# EAGLE board Magician_encoder Panel v10 (EAGLE 6.5.0), part 1 of 2
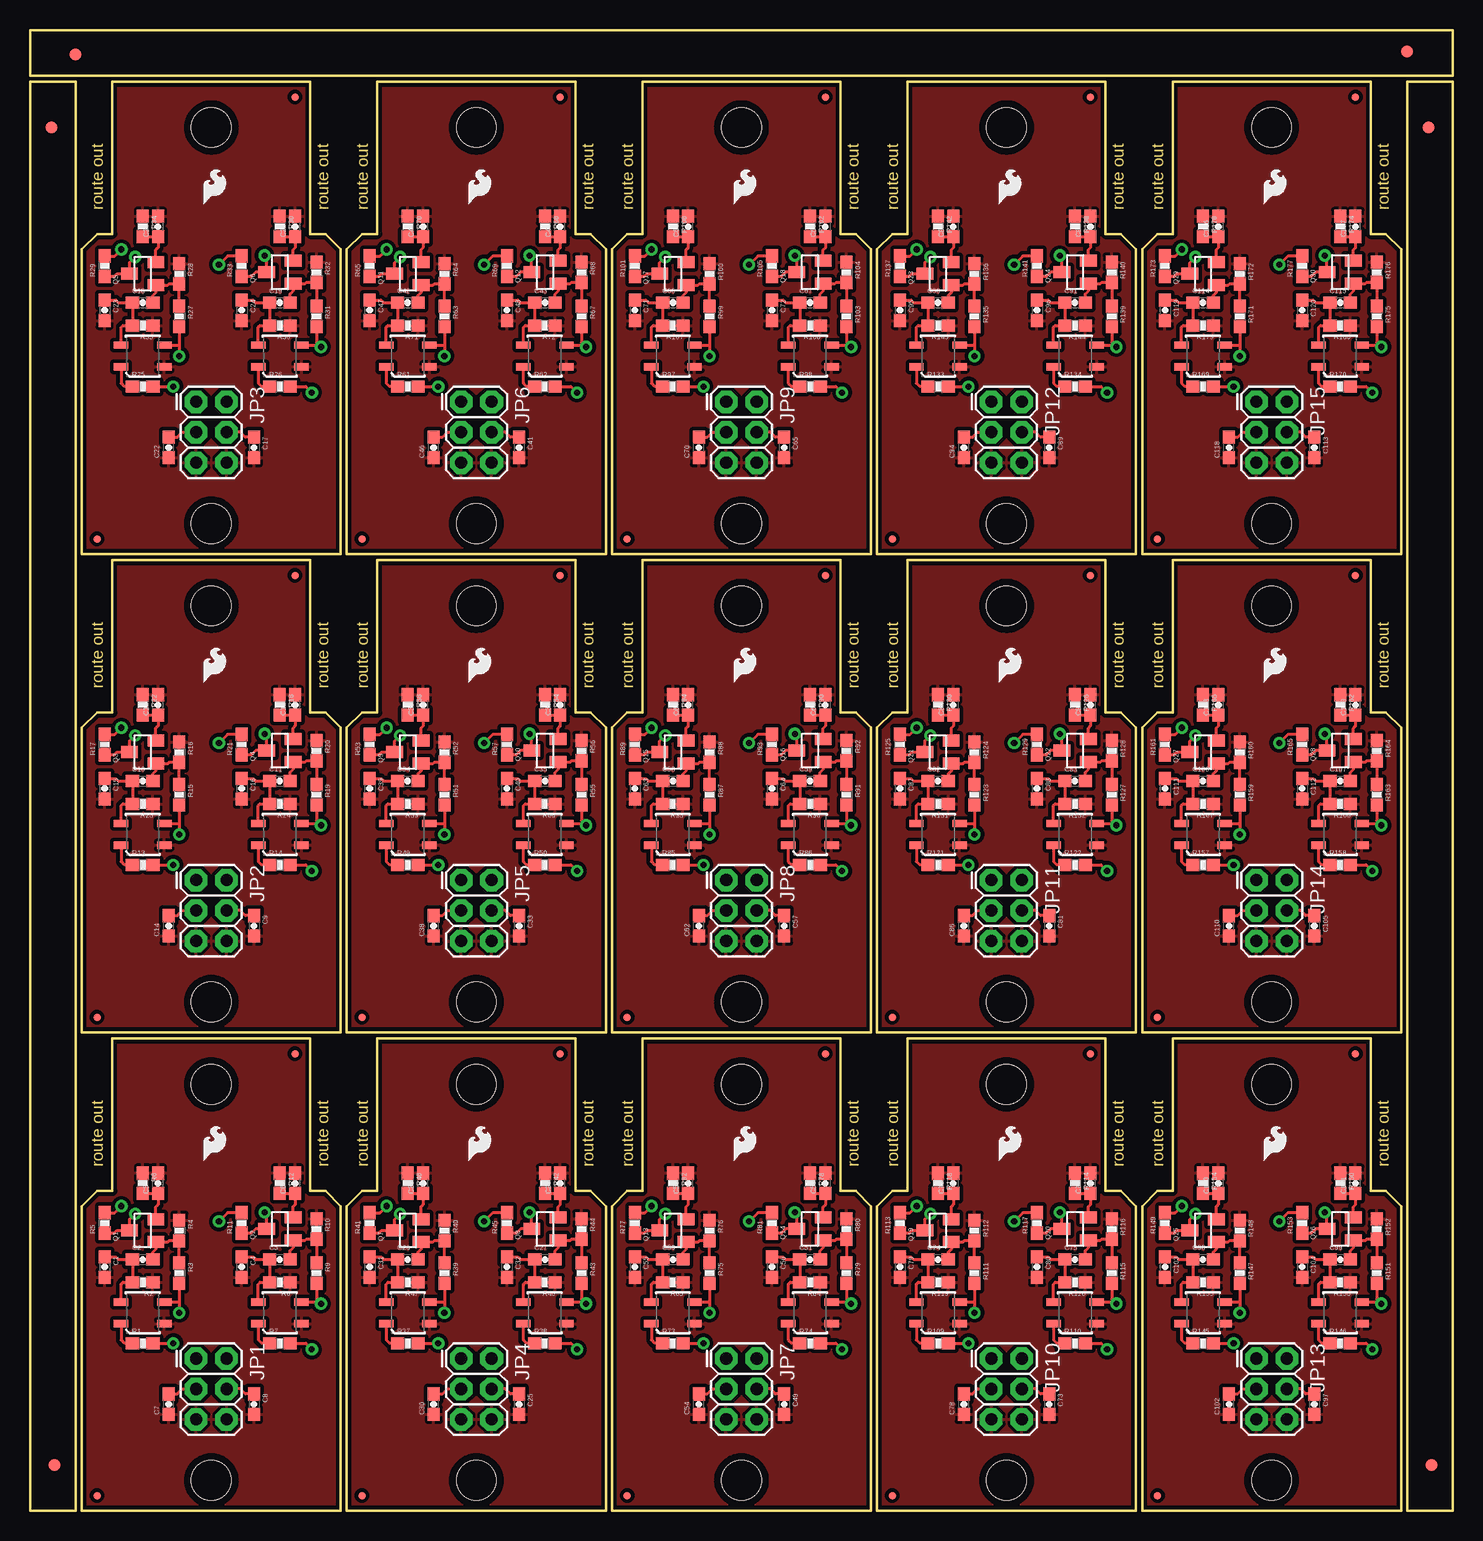
[diagram p0: board, top side]
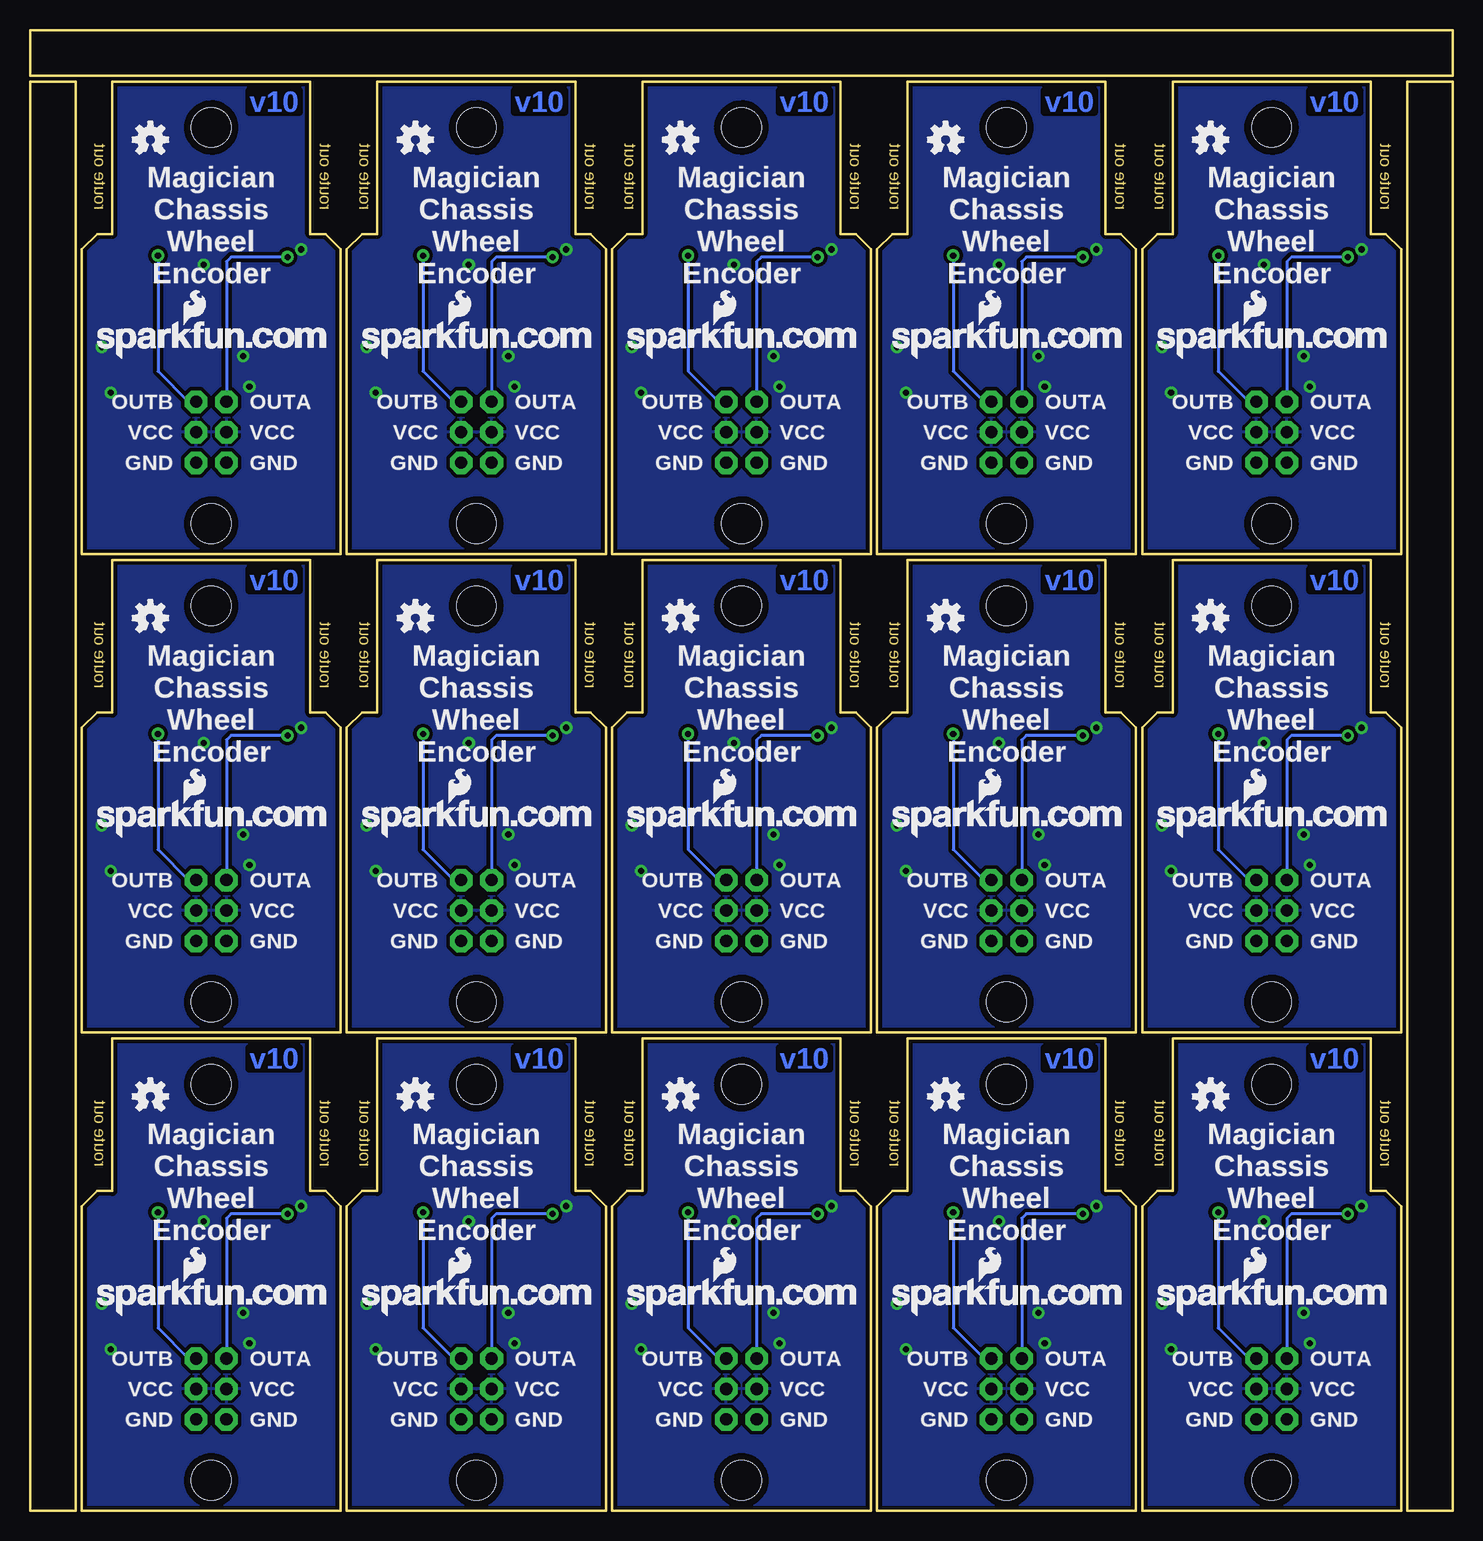
[diagram p1: board, bottom side, seen from below]

Size 118.62 x 123.44 mm. Coordinates in mm from the lower left corner, seen from the top.
Outline: 25.91,25.4 25.91,0 4.32,0 4.32,25.4 5.59,26.67 6.86,26.67 6.86,39.37 23.37,39.37 23.37,26.67 24.64,26.67 25.91,25.4
Outline: 25.91,65.28 25.91,39.88 4.32,39.88 4.32,65.28 5.59,66.55 6.86,66.55 6.86,79.25 23.37,79.25 23.37,66.55 24.64,66.55 25.91,65.28
Outline: 25.91,105.16 25.91,79.76 4.32,79.76 4.32,105.16 5.59,106.43 6.86,106.43 6.86,119.13 23.37,119.13 23.37,106.43 24.64,106.43 25.91,105.16
Outline: 48.01,25.4 48.01,0 26.42,0 26.42,25.4 27.69,26.67 28.96,26.67 28.96,39.37 45.47,39.37 45.47,26.67 46.74,26.67 48.01,25.4
Outline: 48.01,65.28 48.01,39.88 26.42,39.88 26.42,65.28 27.69,66.55 28.96,66.55 28.96,79.25 45.47,79.25 45.47,66.55 46.74,66.55 48.01,65.28
Outline: 48.01,105.16 48.01,79.76 26.42,79.76 26.42,105.16 27.69,106.43 28.96,106.43 28.96,119.13 45.47,119.13 45.47,106.43 46.74,106.43 48.01,105.16
Outline: 70.1,25.4 70.1,0 48.51,0 48.51,25.4 49.78,26.67 51.05,26.67 51.05,39.37 67.56,39.37 67.56,26.67 68.83,26.67 70.1,25.4
Outline: 70.1,65.28 70.1,39.88 48.51,39.88 48.51,65.28 49.78,66.55 51.05,66.55 51.05,79.25 67.56,79.25 67.56,66.55 68.83,66.55 70.1,65.28
Outline: 70.1,105.16 70.1,79.76 48.51,79.76 48.51,105.16 49.78,106.43 51.05,106.43 51.05,119.13 67.56,119.13 67.56,106.43 68.83,106.43 70.1,105.16
Outline: 92.2,25.4 92.2,0 70.61,0 70.61,25.4 71.88,26.67 73.15,26.67 73.15,39.37 89.66,39.37 89.66,26.67 90.93,26.67 92.2,25.4
Outline: 92.2,65.28 92.2,39.88 70.61,39.88 70.61,65.28 71.88,66.55 73.15,66.55 73.15,79.25 89.66,79.25 89.66,66.55 90.93,66.55 92.2,65.28
Outline: 92.2,105.16 92.2,79.76 70.61,79.76 70.61,105.16 71.88,106.43 73.15,106.43 73.15,119.13 89.66,119.13 89.66,106.43 90.93,106.43 92.2,105.16
Outline: 114.3,25.4 114.3,0 92.71,0 92.71,25.4 93.98,26.67 95.25,26.67 95.25,39.37 111.76,39.37 111.76,26.67 113.03,26.67 114.3,25.4
Outline: 114.3,65.28 114.3,39.88 92.71,39.88 92.71,65.28 93.98,66.55 95.25,66.55 95.25,79.25 111.76,79.25 111.76,66.55 113.03,66.55 114.3,65.28
Outline: 114.3,105.16 114.3,79.76 92.71,79.76 92.71,105.16 93.98,106.43 95.25,106.43 95.25,119.13 111.76,119.13 111.76,106.43 113.03,106.43 114.3,105.16
Outline: 3.81,0 3.81,119.13 0,119.13 0,34.8 0,30.23 0,0 3.81,0
Outline: 118.62,0 118.62,119.13 114.81,119.13 114.81,0 118.62,0
Outline: 0,119.63 118.62,119.63 118.62,123.44 0,123.44 0,119.63
Copper layers (1*16): Top 0.035mm / dielectric 1.5mm / Bottom 0.035mm
Design rules "Sparkfun": minimum track width 8mil, minimum drill 20mil, track to track 8mil, track to pad 8mil, pad to pad 8mil, via to via 8mil, smd to smd 8mil, copper to edge 8mil, drill to drill 8mil, minimum pad ring 12mil, minimum via ring 10mil, stop-mask expansion 4mil, vias tented up to drill 20mil, thermal gap 10mil

## Footprints (pad centres in the part's own frame; a part is rotated, then mirrored left to right if it is on the bottom)
0603-CAP = smd 1.1 x 1: 1 -0.85,0; 2 0.85,0
FIDUCIAL-1X2 = smd 1 x 1: 1 0,0
MICRO-FIDUCIAL = smd 0.635 x 0.635: 1 0,0
2X3 = drill 1.016 pad 1.88 octagon: 1 0,0; 2 0,2.54; 3 2.54,0; 4 2.54,2.54; 5 5.08,0; 6 5.08,2.54
SOT23 = smd 1 x 1.4: 1 -0.95,-1.1; 2 0.95,-1.1; 3 0,1.1
0603-RES = smd 1.1 x 1: 1 -0.85,0; 2 0.85,0
STAND-OFF = hole 3.302: 0,0
QRE1113 = smd 1.2 x 0.6: 1 -1.8,-0.9; 2 1.8,-0.9; 3 1.8,0.9; 4 -1.8,0.9

## Placement (x,y rotation side)
C1  0.1uF  [0603-CAP]  6.22,20.32 270 top
C2  1.0uF  [0603-CAP]  9.4,20.95 0 top
C3  0.1uF  [0603-CAP]  10.67,27.3 90 top
C4  0.1uF  [0603-CAP]  17.65,20.32 270 top
C5  1.0uF  [0603-CAP]  20.83,20.95 0 top
C6  0.1uF  [0603-CAP]  22.1,27.3 90 top
C7  1.0uF  [0603-CAP]  11.56,8.89 90 top
C8  0.1uF  [0603-CAP]  18.67,8.89 270 top
C9  0.1uF  [0603-CAP]  18.67,48.77 270 top
C10  1.0uF  [0603-CAP]  9.4,60.83 0 top
C11  1.0uF  [0603-CAP]  20.83,60.83 0 top
C12  0.1uF  [0603-CAP]  10.67,67.18 90 top
C13  0.1uF  [0603-CAP]  22.1,67.18 90 top
C14  1.0uF  [0603-CAP]  11.56,48.77 90 top
C15  0.1uF  [0603-CAP]  6.22,60.2 270 top
C16  0.1uF  [0603-CAP]  17.65,60.2 270 top
C17  0.1uF  [0603-CAP]  18.67,88.65 270 top
C18  1.0uF  [0603-CAP]  9.4,100.71 0 top
C19  1.0uF  [0603-CAP]  20.83,100.71 0 top
C20  0.1uF  [0603-CAP]  10.67,107.06 90 top
C21  0.1uF  [0603-CAP]  22.1,107.06 90 top
C22  1.0uF  [0603-CAP]  11.56,88.65 90 top
C23  0.1uF  [0603-CAP]  6.22,100.08 270 top
C24  0.1uF  [0603-CAP]  17.65,100.08 270 top
C25  0.1uF  [0603-CAP]  40.77,8.89 270 top
C26  1.0uF  [0603-CAP]  31.5,20.95 0 top
C27  1.0uF  [0603-CAP]  42.93,20.95 0 top
C28  0.1uF  [0603-CAP]  32.77,27.3 90 top
C29  0.1uF  [0603-CAP]  44.2,27.3 90 top
C30  1.0uF  [0603-CAP]  33.66,8.89 90 top
C31  0.1uF  [0603-CAP]  28.32,20.32 270 top
C32  0.1uF  [0603-CAP]  39.75,20.32 270 top
C33  0.1uF  [0603-CAP]  40.77,48.77 270 top
C34  1.0uF  [0603-CAP]  31.5,60.83 0 top
C35  1.0uF  [0603-CAP]  42.93,60.83 0 top
C36  0.1uF  [0603-CAP]  32.77,67.18 90 top
C37  0.1uF  [0603-CAP]  44.2,67.18 90 top
C38  1.0uF  [0603-CAP]  33.66,48.77 90 top
C39  0.1uF  [0603-CAP]  28.32,60.2 270 top
C40  0.1uF  [0603-CAP]  39.75,60.2 270 top
C41  0.1uF  [0603-CAP]  40.77,88.65 270 top
C42  1.0uF  [0603-CAP]  31.5,100.71 0 top
C43  1.0uF  [0603-CAP]  42.93,100.71 0 top
C44  0.1uF  [0603-CAP]  32.77,107.06 90 top
C45  0.1uF  [0603-CAP]  44.2,107.06 90 top
C46  1.0uF  [0603-CAP]  33.66,88.65 90 top
C47  0.1uF  [0603-CAP]  28.32,100.08 270 top
C48  0.1uF  [0603-CAP]  39.75,100.08 270 top
C49  0.1uF  [0603-CAP]  62.86,8.89 270 top
C50  1.0uF  [0603-CAP]  53.59,20.95 0 top
C51  1.0uF  [0603-CAP]  65.02,20.95 0 top
C52  0.1uF  [0603-CAP]  54.86,27.3 90 top
C53  0.1uF  [0603-CAP]  66.29,27.3 90 top
C54  1.0uF  [0603-CAP]  55.75,8.89 90 top
C55  0.1uF  [0603-CAP]  50.42,20.32 270 top
C56  0.1uF  [0603-CAP]  61.85,20.32 270 top
C57  0.1uF  [0603-CAP]  62.86,48.77 270 top
C58  1.0uF  [0603-CAP]  53.59,60.83 0 top
C59  1.0uF  [0603-CAP]  65.02,60.83 0 top
C60  0.1uF  [0603-CAP]  54.86,67.18 90 top
C61  0.1uF  [0603-CAP]  66.29,67.18 90 top
C62  1.0uF  [0603-CAP]  55.75,48.77 90 top
C63  0.1uF  [0603-CAP]  50.42,60.2 270 top
C64  0.1uF  [0603-CAP]  61.85,60.2 270 top
C65  0.1uF  [0603-CAP]  62.86,88.65 270 top
C66  1.0uF  [0603-CAP]  53.59,100.71 0 top
C67  1.0uF  [0603-CAP]  65.02,100.71 0 top
C68  0.1uF  [0603-CAP]  54.86,107.06 90 top
C69  0.1uF  [0603-CAP]  66.29,107.06 90 top
C70  1.0uF  [0603-CAP]  55.75,88.65 90 top
C71  0.1uF  [0603-CAP]  50.42,100.08 270 top
C72  0.1uF  [0603-CAP]  61.85,100.08 270 top
C73  0.1uF  [0603-CAP]  84.96,8.89 270 top
C74  1.0uF  [0603-CAP]  75.69,20.95 0 top
C75  1.0uF  [0603-CAP]  87.12,20.95 0 top
C76  0.1uF  [0603-CAP]  76.96,27.3 90 top
C77  0.1uF  [0603-CAP]  88.39,27.3 90 top
C78  1.0uF  [0603-CAP]  77.85,8.89 90 top
C79  0.1uF  [0603-CAP]  72.52,20.32 270 top
C80  0.1uF  [0603-CAP]  83.95,20.32 270 top
C81  0.1uF  [0603-CAP]  84.96,48.77 270 top
C82  1.0uF  [0603-CAP]  75.69,60.83 0 top
C83  1.0uF  [0603-CAP]  87.12,60.83 0 top
C84  0.1uF  [0603-CAP]  76.96,67.18 90 top
C85  0.1uF  [0603-CAP]  88.39,67.18 90 top
C86  1.0uF  [0603-CAP]  77.85,48.77 90 top
C87  0.1uF  [0603-CAP]  72.52,60.2 270 top
C88  0.1uF  [0603-CAP]  83.95,60.2 270 top
C89  0.1uF  [0603-CAP]  84.96,88.65 270 top
C90  1.0uF  [0603-CAP]  75.69,100.71 0 top
C91  1.0uF  [0603-CAP]  87.12,100.71 0 top
C92  0.1uF  [0603-CAP]  76.96,107.06 90 top
C93  0.1uF  [0603-CAP]  88.39,107.06 90 top
C94  1.0uF  [0603-CAP]  77.85,88.65 90 top
C95  0.1uF  [0603-CAP]  72.52,100.08 270 top
C96  0.1uF  [0603-CAP]  83.95,100.08 270 top
C97  0.1uF  [0603-CAP]  107.06,8.89 270 top
C98  1.0uF  [0603-CAP]  97.79,20.95 0 top
C99  1.0uF  [0603-CAP]  109.22,20.95 0 top
C100  0.1uF  [0603-CAP]  99.06,27.3 90 top
C101  0.1uF  [0603-CAP]  110.49,27.3 90 top
C102  1.0uF  [0603-CAP]  99.95,8.89 90 top
C103  0.1uF  [0603-CAP]  94.61,20.32 270 top
C104  0.1uF  [0603-CAP]  106.05,20.32 270 top
C105  0.1uF  [0603-CAP]  107.06,48.77 270 top
C106  1.0uF  [0603-CAP]  97.79,60.83 0 top
C107  1.0uF  [0603-CAP]  109.22,60.83 0 top
C108  0.1uF  [0603-CAP]  99.06,67.18 90 top
C109  0.1uF  [0603-CAP]  110.49,67.18 90 top
C110  1.0uF  [0603-CAP]  99.95,48.77 90 top
C111  0.1uF  [0603-CAP]  94.61,60.2 270 top
C112  0.1uF  [0603-CAP]  106.05,60.2 270 top
C113  0.1uF  [0603-CAP]  107.06,88.65 270 top
C114  1.0uF  [0603-CAP]  97.79,100.71 0 top
C115  1.0uF  [0603-CAP]  109.22,100.71 0 top
C116  0.1uF  [0603-CAP]  99.06,107.06 90 top
C117  0.1uF  [0603-CAP]  110.49,107.06 90 top
C118  1.0uF  [0603-CAP]  99.95,88.65 90 top
C119  0.1uF  [0603-CAP]  94.61,100.08 270 top
C120  0.1uF  [0603-CAP]  106.05,100.08 270 top
E$1  [FIDUCIAL-1X2]  2.03,3.81 0 top
E$2  [FIDUCIAL-1X2]  116.84,3.81 0 top
E$3  [FIDUCIAL-1X2]  116.59,115.32 180 top
E$4  [FIDUCIAL-1X2]  1.78,115.32 180 top
E$5  [FIDUCIAL-1X2]  3.81,121.41 270 top
E$6  [FIDUCIAL-1X2]  114.81,121.67 90 top
FID1  FIDUCIALUFIDUCIAL  [MICRO-FIDUCIAL]  22.1,38.1 0 top
FID2  FIDUCIALUFIDUCIAL  [MICRO-FIDUCIAL]  5.59,1.27 0 top
FID3  FIDUCIALUFIDUCIAL  [MICRO-FIDUCIAL]  22.1,77.98 0 top
FID4  FIDUCIALUFIDUCIAL  [MICRO-FIDUCIAL]  5.59,41.15 0 top
FID5  FIDUCIALUFIDUCIAL  [MICRO-FIDUCIAL]  22.1,117.86 0 top
FID6  FIDUCIALUFIDUCIAL  [MICRO-FIDUCIAL]  5.59,81.03 0 top
FID7  FIDUCIALUFIDUCIAL  [MICRO-FIDUCIAL]  44.2,38.1 0 top
FID8  FIDUCIALUFIDUCIAL  [MICRO-FIDUCIAL]  27.69,1.27 0 top
FID9  FIDUCIALUFIDUCIAL  [MICRO-FIDUCIAL]  44.2,77.98 0 top
FID10  FIDUCIALUFIDUCIAL  [MICRO-FIDUCIAL]  27.69,41.15 0 top
FID11  FIDUCIALUFIDUCIAL  [MICRO-FIDUCIAL]  44.2,117.86 0 top
FID12  FIDUCIALUFIDUCIAL  [MICRO-FIDUCIAL]  27.69,81.03 0 top
FID13  FIDUCIALUFIDUCIAL  [MICRO-FIDUCIAL]  66.29,38.1 0 top
FID14  FIDUCIALUFIDUCIAL  [MICRO-FIDUCIAL]  49.78,1.27 0 top
FID15  FIDUCIALUFIDUCIAL  [MICRO-FIDUCIAL]  66.29,77.98 0 top
FID16  FIDUCIALUFIDUCIAL  [MICRO-FIDUCIAL]  49.78,41.15 0 top
FID17  FIDUCIALUFIDUCIAL  [MICRO-FIDUCIAL]  66.29,117.86 0 top
FID18  FIDUCIALUFIDUCIAL  [MICRO-FIDUCIAL]  49.78,81.03 0 top
FID19  FIDUCIALUFIDUCIAL  [MICRO-FIDUCIAL]  88.39,38.1 0 top
FID20  FIDUCIALUFIDUCIAL  [MICRO-FIDUCIAL]  71.88,1.27 0 top
FID21  FIDUCIALUFIDUCIAL  [MICRO-FIDUCIAL]  88.39,77.98 0 top
FID22  FIDUCIALUFIDUCIAL  [MICRO-FIDUCIAL]  71.88,41.15 0 top
FID23  FIDUCIALUFIDUCIAL  [MICRO-FIDUCIAL]  88.39,117.86 0 top
FID24  FIDUCIALUFIDUCIAL  [MICRO-FIDUCIAL]  71.88,81.03 0 top
FID25  FIDUCIALUFIDUCIAL  [MICRO-FIDUCIAL]  110.49,38.1 0 top
FID26  FIDUCIALUFIDUCIAL  [MICRO-FIDUCIAL]  93.98,1.27 0 top
FID27  FIDUCIALUFIDUCIAL  [MICRO-FIDUCIAL]  110.49,77.98 0 top
FID28  FIDUCIALUFIDUCIAL  [MICRO-FIDUCIAL]  93.98,41.15 0 top
FID29  FIDUCIALUFIDUCIAL  [MICRO-FIDUCIAL]  110.49,117.86 0 top
FID30  FIDUCIALUFIDUCIAL  [MICRO-FIDUCIAL]  93.98,81.03 0 top
JP1  [2X3]  13.84,12.7 270 top
JP2  [2X3]  13.84,52.58 270 top
JP3  [2X3]  13.84,92.46 270 top
JP4  [2X3]  35.94,12.7 270 top
JP5  [2X3]  35.94,52.58 270 top
JP6  [2X3]  35.94,92.46 270 top
JP7  [2X3]  58.04,12.7 270 top
JP8  [2X3]  58.04,52.58 270 top
JP9  [2X3]  58.04,92.46 270 top
JP10  [2X3]  80.14,12.7 270 top
JP11  [2X3]  80.14,52.58 270 top
JP12  [2X3]  80.14,92.46 270 top
JP13  [2X3]  102.23,12.7 270 top
JP14  [2X3]  102.23,52.58 270 top
JP15  [2X3]  102.23,92.46 270 top
LOGO1  LOGO-SFESK  [SFE-LOGO-FLAME]  14.48,29.21 0 top
LOGO2  OSHW-LOGOS  [OSHW-LOGO-S]  20.19,74.42 0 bottom
LOGO3  OSHW-LOGOS  [OSHW-LOGO-S]  20.19,34.54 0 bottom
LOGO4  LOGO-SFENEW  [SFE-NEW-WEBLOGO]  24.64,16.26 0 bottom
LOGO5  LOGO-SFENEW  [SFE-NEW-WEBLOGO]  24.64,56.13 0 bottom
LOGO6  LOGO-SFESK  [SFE-LOGO-FLAME]  14.48,69.09 0 top
LOGO7  OSHW-LOGOS  [OSHW-LOGO-S]  20.19,114.3 0 bottom
LOGO8  LOGO-SFENEW  [SFE-NEW-WEBLOGO]  24.64,96.01 0 bottom
LOGO9  LOGO-SFESK  [SFE-LOGO-FLAME]  14.48,108.97 0 top
LOGO10  OSHW-LOGOS  [OSHW-LOGO-S]  42.29,34.54 0 bottom
LOGO11  LOGO-SFENEW  [SFE-NEW-WEBLOGO]  46.74,16.26 0 bottom
LOGO12  LOGO-SFESK  [SFE-LOGO-FLAME]  36.58,29.21 0 top
LOGO13  OSHW-LOGOS  [OSHW-LOGO-S]  42.29,74.42 0 bottom
LOGO14  LOGO-SFENEW  [SFE-NEW-WEBLOGO]  46.74,56.13 0 bottom
LOGO15  LOGO-SFESK  [SFE-LOGO-FLAME]  36.58,69.09 0 top
LOGO16  OSHW-LOGOS  [OSHW-LOGO-S]  42.29,114.3 0 bottom
LOGO17  LOGO-SFENEW  [SFE-NEW-WEBLOGO]  46.74,96.01 0 bottom
LOGO18  LOGO-SFESK  [SFE-LOGO-FLAME]  36.58,108.97 0 top
LOGO19  OSHW-LOGOS  [OSHW-LOGO-S]  64.39,34.54 0 bottom
LOGO20  LOGO-SFENEW  [SFE-NEW-WEBLOGO]  68.83,16.26 0 bottom
LOGO21  LOGO-SFESK  [SFE-LOGO-FLAME]  58.67,29.21 0 top
LOGO22  OSHW-LOGOS  [OSHW-LOGO-S]  64.39,74.42 0 bottom
LOGO23  LOGO-SFENEW  [SFE-NEW-WEBLOGO]  68.83,56.13 0 bottom
LOGO24  LOGO-SFESK  [SFE-LOGO-FLAME]  58.67,69.09 0 top
LOGO25  OSHW-LOGOS  [OSHW-LOGO-S]  64.39,114.3 0 bottom
LOGO26  LOGO-SFENEW  [SFE-NEW-WEBLOGO]  68.83,96.01 0 bottom
LOGO27  LOGO-SFESK  [SFE-LOGO-FLAME]  58.67,108.97 0 top
LOGO28  OSHW-LOGOS  [OSHW-LOGO-S]  86.49,34.54 0 bottom
LOGO29  LOGO-SFENEW  [SFE-NEW-WEBLOGO]  90.93,16.26 0 bottom
LOGO30  LOGO-SFESK  [SFE-LOGO-FLAME]  80.77,29.21 0 top
LOGO31  OSHW-LOGOS  [OSHW-LOGO-S]  86.49,74.42 0 bottom
LOGO32  LOGO-SFENEW  [SFE-NEW-WEBLOGO]  90.93,56.13 0 bottom
LOGO33  LOGO-SFESK  [SFE-LOGO-FLAME]  80.77,69.09 0 top
LOGO34  OSHW-LOGOS  [OSHW-LOGO-S]  86.49,114.3 0 bottom
LOGO35  LOGO-SFENEW  [SFE-NEW-WEBLOGO]  90.93,96.01 0 bottom
LOGO36  LOGO-SFESK  [SFE-LOGO-FLAME]  80.77,108.97 0 top
LOGO37  OSHW-LOGOS  [OSHW-LOGO-S]  108.58,34.54 0 bottom
LOGO38  LOGO-SFENEW  [SFE-NEW-WEBLOGO]  113.03,16.26 0 bottom
LOGO39  LOGO-SFESK  [SFE-LOGO-FLAME]  102.87,29.21 0 top
LOGO40  OSHW-LOGOS  [OSHW-LOGO-S]  108.58,74.42 0 bottom
LOGO41  LOGO-SFENEW  [SFE-NEW-WEBLOGO]  113.03,56.13 0 bottom
LOGO42  LOGO-SFESK  [SFE-LOGO-FLAME]  102.87,69.09 0 top
LOGO43  OSHW-LOGOS  [OSHW-LOGO-S]  108.58,114.3 0 bottom
LOGO44  LOGO-SFENEW  [SFE-NEW-WEBLOGO]  113.03,96.01 0 bottom
LOGO45  LOGO-SFESK  [SFE-LOGO-FLAME]  102.87,108.97 0 top
Q1  MMBT2222A  [SOT23]  9.4,23.37 90 top
Q2  MMBT2222A  [SOT23]  20.83,23.5 90 top
Q3  MMBT2222A  [SOT23]  9.4,63.25 90 top
Q4  MMBT2222A  [SOT23]  20.83,63.37 90 top
Q5  MMBT2222A  [SOT23]  9.4,103.12 90 top
Q6  MMBT2222A  [SOT23]  20.83,103.25 90 top
Q7  MMBT2222A  [SOT23]  31.5,23.37 90 top
Q8  MMBT2222A  [SOT23]  42.93,23.5 90 top
Q9  MMBT2222A  [SOT23]  31.5,63.25 90 top
Q10  MMBT2222A  [SOT23]  42.93,63.37 90 top
Q11  MMBT2222A  [SOT23]  31.5,103.12 90 top
Q12  MMBT2222A  [SOT23]  42.93,103.25 90 top
Q13  MMBT2222A  [SOT23]  53.59,23.37 90 top
Q14  MMBT2222A  [SOT23]  65.02,23.5 90 top
Q15  MMBT2222A  [SOT23]  53.59,63.25 90 top
Q16  MMBT2222A  [SOT23]  65.02,63.37 90 top
Q17  MMBT2222A  [SOT23]  53.59,103.12 90 top
Q18  MMBT2222A  [SOT23]  65.02,103.25 90 top
Q19  MMBT2222A  [SOT23]  75.69,23.37 90 top
Q20  MMBT2222A  [SOT23]  87.12,23.5 90 top
Q21  MMBT2222A  [SOT23]  75.69,63.25 90 top
Q22  MMBT2222A  [SOT23]  87.12,63.37 90 top
Q23  MMBT2222A  [SOT23]  75.69,103.12 90 top
Q24  MMBT2222A  [SOT23]  87.12,103.25 90 top
Q25  MMBT2222A  [SOT23]  97.79,23.37 90 top
Q26  MMBT2222A  [SOT23]  109.22,23.5 90 top
Q27  MMBT2222A  [SOT23]  97.79,63.25 90 top
Q28  MMBT2222A  [SOT23]  109.22,63.37 90 top
Q29  MMBT2222A  [SOT23]  97.79,103.12 90 top
Q30  MMBT2222A  [SOT23]  109.22,103.25 90 top
R1  100  [0603-RES]  9.4,13.97 0 top
R2  10K  [0603-RES]  9.4,19.05 180 top
R3  47K  [0603-RES]  12.45,19.81 270 top
R4  10K  [0603-RES]  12.45,23.37 270 top
R5  10K  [0603-RES]  6.22,24 90 top
R6  1K  [0603-RES]  9.4,27.3 270 top
R7  100  [0603-RES]  20.83,13.97 0 top
R8  10K  [0603-RES]  20.83,19.05 180 top
R9  47K  [0603-RES]  23.88,19.81 270 top
R10  10K  [0603-RES]  23.88,23.5 270 top
R11  10K  [0603-RES]  17.65,24 90 top
R12  1K  [0603-RES]  20.83,27.3 270 top
R13  100  [0603-RES]  9.4,53.85 0 top
R14  100  [0603-RES]  20.83,53.85 0 top
R15  47K  [0603-RES]  12.45,59.69 270 top
R16  10K  [0603-RES]  12.45,63.25 270 top
R17  10K  [0603-RES]  6.22,63.88 90 top
R18  1K  [0603-RES]  20.83,67.18 270 top
R19  47K  [0603-RES]  23.88,59.69 270 top
R20  10K  [0603-RES]  23.88,63.37 270 top
R21  10K  [0603-RES]  17.65,63.88 90 top
R22  1K  [0603-RES]  9.4,67.18 270 top
R23  10K  [0603-RES]  9.4,58.93 180 top
R24  10K  [0603-RES]  20.83,58.93 180 top
R25  100  [0603-RES]  9.4,93.73 0 top
R26  100  [0603-RES]  20.83,93.73 0 top
R27  47K  [0603-RES]  12.45,99.57 270 top
R28  10K  [0603-RES]  12.45,103.12 270 top
R29  10K  [0603-RES]  6.22,103.76 90 top
R30  1K  [0603-RES]  20.83,107.06 270 top
R31  47K  [0603-RES]  23.88,99.57 270 top
R32  10K  [0603-RES]  23.88,103.25 270 top
R33  10K  [0603-RES]  17.65,103.76 90 top
R34  1K  [0603-RES]  9.4,107.06 270 top
R35  10K  [0603-RES]  9.4,98.81 180 top
R36  10K  [0603-RES]  20.83,98.81 180 top
R37  100  [0603-RES]  31.5,13.97 0 top
R38  100  [0603-RES]  42.93,13.97 0 top
R39  47K  [0603-RES]  34.54,19.81 270 top
R40  10K  [0603-RES]  34.54,23.37 270 top
R41  10K  [0603-RES]  28.32,24 90 top
R42  1K  [0603-RES]  42.93,27.3 270 top
R43  47K  [0603-RES]  45.97,19.81 270 top
R44  10K  [0603-RES]  45.97,23.5 270 top
R45  10K  [0603-RES]  39.75,24 90 top
R46  1K  [0603-RES]  31.5,27.3 270 top
R47  10K  [0603-RES]  31.5,19.05 180 top
R48  10K  [0603-RES]  42.93,19.05 180 top
R49  100  [0603-RES]  31.5,53.85 0 top
R50  100  [0603-RES]  42.93,53.85 0 top
R51  47K  [0603-RES]  34.54,59.69 270 top
R52  10K  [0603-RES]  34.54,63.25 270 top
R53  10K  [0603-RES]  28.32,63.88 90 top
R54  1K  [0603-RES]  42.93,67.18 270 top
R55  47K  [0603-RES]  45.97,59.69 270 top
R56  10K  [0603-RES]  45.97,63.37 270 top
R57  10K  [0603-RES]  39.75,63.88 90 top
R58  1K  [0603-RES]  31.5,67.18 270 top
R59  10K  [0603-RES]  31.5,58.93 180 top
R60  10K  [0603-RES]  42.93,58.93 180 top
R61  100  [0603-RES]  31.5,93.73 0 top
R62  100  [0603-RES]  42.93,93.73 0 top
R63  47K  [0603-RES]  34.54,99.57 270 top
R64  10K  [0603-RES]  34.54,103.12 270 top
R65  10K  [0603-RES]  28.32,103.76 90 top
R66  1K  [0603-RES]  42.93,107.06 270 top
R67  47K  [0603-RES]  45.97,99.57 270 top
R68  10K  [0603-RES]  45.97,103.25 270 top
R69  10K  [0603-RES]  39.75,103.76 90 top
R70  1K  [0603-RES]  31.5,107.06 270 top
R71  10K  [0603-RES]  31.5,98.81 180 top
R72  10K  [0603-RES]  42.93,98.81 180 top
R73  100  [0603-RES]  53.59,13.97 0 top
R74  100  [0603-RES]  65.02,13.97 0 top
R75  47K  [0603-RES]  56.64,19.81 270 top
R76  10K  [0603-RES]  56.64,23.37 270 top
R77  10K  [0603-RES]  50.42,24 90 top
R78  1K  [0603-RES]  65.02,27.3 270 top
R79  47K  [0603-RES]  68.07,19.81 270 top
R80  10K  [0603-RES]  68.07,23.5 270 top
R81  10K  [0603-RES]  61.85,24 90 top
R82  1K  [0603-RES]  53.59,27.3 270 top
R83  10K  [0603-RES]  53.59,19.05 180 top
R84  10K  [0603-RES]  65.02,19.05 180 top
R85  100  [0603-RES]  53.59,53.85 0 top
R86  100  [0603-RES]  65.02,53.85 0 top
R87  47K  [0603-RES]  56.64,59.69 270 top
R88  10K  [0603-RES]  56.64,63.25 270 top
R89  10K  [0603-RES]  50.42,63.88 90 top
R90  1K  [0603-RES]  65.02,67.18 270 top
R91  47K  [0603-RES]  68.07,59.69 270 top
R92  10K  [0603-RES]  68.07,63.37 270 top
R93  10K  [0603-RES]  61.85,63.88 90 top
R94  1K  [0603-RES]  53.59,67.18 270 top
R95  10K  [0603-RES]  53.59,58.93 180 top
R96  10K  [0603-RES]  65.02,58.93 180 top
R97  100  [0603-RES]  53.59,93.73 0 top
R98  100  [0603-RES]  65.02,93.73 0 top
R99  47K  [0603-RES]  56.64,99.57 270 top
R100  10K  [0603-RES]  56.64,103.12 270 top
R101  10K  [0603-RES]  50.42,103.76 90 top
R102  1K  [0603-RES]  65.02,107.06 270 top
R103  47K  [0603-RES]  68.07,99.57 270 top
R104  10K  [0603-RES]  68.07,103.25 270 top
R105  10K  [0603-RES]  61.85,103.76 90 top
R106  1K  [0603-RES]  53.59,107.06 270 top
R107  10K  [0603-RES]  53.59,98.81 180 top
R108  10K  [0603-RES]  65.02,98.81 180 top
R109  100  [0603-RES]  75.69,13.97 0 top
R110  100  [0603-RES]  87.12,13.97 0 top
R111  47K  [0603-RES]  78.74,19.81 270 top
R112  10K  [0603-RES]  78.74,23.37 270 top
R113  10K  [0603-RES]  72.52,24 90 top
R114  1K  [0603-RES]  87.12,27.3 270 top
R115  47K  [0603-RES]  90.17,19.81 270 top
R116  10K  [0603-RES]  90.17,23.5 270 top
R117  10K  [0603-RES]  83.95,24 90 top
R118  1K  [0603-RES]  75.69,27.3 270 top
R119  10K  [0603-RES]  75.69,19.05 180 top
R120  10K  [0603-RES]  87.12,19.05 180 top
R121  100  [0603-RES]  75.69,53.85 0 top
R122  100  [0603-RES]  87.12,53.85 0 top
R123  47K  [0603-RES]  78.74,59.69 270 top
R124  10K  [0603-RES]  78.74,63.25 270 top
R125  10K  [0603-RES]  72.52,63.88 90 top
R126  1K  [0603-RES]  87.12,67.18 270 top
R127  47K  [0603-RES]  90.17,59.69 270 top
R128  10K  [0603-RES]  90.17,63.37 270 top
R129  10K  [0603-RES]  83.95,63.88 90 top
R130  1K  [0603-RES]  75.69,67.18 270 top
R131  10K  [0603-RES]  75.69,58.93 180 top
R132  10K  [0603-RES]  87.12,58.93 180 top
R133  100  [0603-RES]  75.69,93.73 0 top
R134  100  [0603-RES]  87.12,93.73 0 top
R135  47K  [0603-RES]  78.74,99.57 270 top
R136  10K  [0603-RES]  78.74,103.12 270 top
R137  10K  [0603-RES]  72.52,103.76 90 top
R138  1K  [0603-RES]  87.12,107.06 270 top
R139  47K  [0603-RES]  90.17,99.57 270 top
R140  10K  [0603-RES]  90.17,103.25 270 top
R141  10K  [0603-RES]  83.95,103.76 90 top
R142  1K  [0603-RES]  75.69,107.06 270 top
R143  10K  [0603-RES]  75.69,98.81 180 top
R144  10K  [0603-RES]  87.12,98.81 180 top
R145  100  [0603-RES]  97.79,13.97 0 top
R146  100  [0603-RES]  109.22,13.97 0 top
R147  47K  [0603-RES]  100.84,19.81 270 top
R148  10K  [0603-RES]  100.84,23.37 270 top
R149  10K  [0603-RES]  94.61,24 90 top
R150  1K  [0603-RES]  109.22,27.3 270 top
R151  47K  [0603-RES]  112.27,19.81 270 top
R152  10K  [0603-RES]  112.27,23.5 270 top
R153  10K  [0603-RES]  106.05,24 90 top
R154  1K  [0603-RES]  97.79,27.3 270 top
R155  10K  [0603-RES]  97.79,19.05 180 top
R156  10K  [0603-RES]  109.22,19.05 180 top
R157  100  [0603-RES]  97.79,53.85 0 top
R158  100  [0603-RES]  109.22,53.85 0 top
R159  47K  [0603-RES]  100.84,59.69 270 top
R160  10K  [0603-RES]  100.84,63.25 270 top
R161  10K  [0603-RES]  94.61,63.88 90 top
R162  1K  [0603-RES]  109.22,67.18 270 top
R163  47K  [0603-RES]  112.27,59.69 270 top
R164  10K  [0603-RES]  112.27,63.37 270 top
R165  10K  [0603-RES]  106.05,63.88 90 top
R166  1K  [0603-RES]  97.79,67.18 270 top
R167  10K  [0603-RES]  97.79,58.93 180 top
R168  10K  [0603-RES]  109.22,58.93 180 top
R169  100  [0603-RES]  97.79,93.73 0 top
R170  100  [0603-RES]  109.22,93.73 0 top
R171  47K  [0603-RES]  100.84,99.57 270 top
R172  10K  [0603-RES]  100.84,103.12 270 top
R173  10K  [0603-RES]  94.61,103.76 90 top
R174  1K  [0603-RES]  109.22,107.06 270 top
R175  47K  [0603-RES]  112.27,99.57 270 top
R176  10K  [0603-RES]  112.27,103.25 270 top
R177  10K  [0603-RES]  106.05,103.76 90 top
R178  1K  [0603-RES]  97.79,107.06 270 top
R179  10K  [0603-RES]  97.79,98.81 180 top
R180  10K  [0603-RES]  109.22,98.81 180 top
STANDOFF1  STAND-OFF  [STAND-OFF]  15.11,2.54 0 top
STANDOFF2  STAND-OFF  [STAND-OFF]  15.11,35.56 0 top
STANDOFF3  STAND-OFF  [STAND-OFF]  15.11,42.42 0 top
STANDOFF4  STAND-OFF  [STAND-OFF]  15.11,75.44 0 top
STANDOFF5  STAND-OFF  [STAND-OFF]  15.11,82.3 0 top
STANDOFF6  STAND-OFF  [STAND-OFF]  15.11,115.32 0 top
STANDOFF7  STAND-OFF  [STAND-OFF]  37.21,2.54 0 top
STANDOFF8  STAND-OFF  [STAND-OFF]  37.21,35.56 0 top
STANDOFF9  STAND-OFF  [STAND-OFF]  37.21,42.42 0 top
STANDOFF10  STAND-OFF  [STAND-OFF]  37.21,75.44 0 top
STANDOFF11  STAND-OFF  [STAND-OFF]  37.21,82.3 0 top
STANDOFF12  STAND-OFF  [STAND-OFF]  37.21,115.32 0 top
STANDOFF13  STAND-OFF  [STAND-OFF]  59.31,2.54 0 top
STANDOFF14  STAND-OFF  [STAND-OFF]  59.31,35.56 0 top
STANDOFF15  STAND-OFF  [STAND-OFF]  59.31,42.42 0 top
STANDOFF16  STAND-OFF  [STAND-OFF]  59.31,75.44 0 top
STANDOFF17  STAND-OFF  [STAND-OFF]  59.31,82.3 0 top
STANDOFF18  STAND-OFF  [STAND-OFF]  59.31,115.32 0 top
STANDOFF19  STAND-OFF  [STAND-OFF]  81.41,2.54 0 top
STANDOFF20  STAND-OFF  [STAND-OFF]  81.41,35.56 0 top
STANDOFF21  STAND-OFF  [STAND-OFF]  81.41,42.42 0 top
STANDOFF22  STAND-OFF  [STAND-OFF]  81.41,75.44 0 top
STANDOFF23  STAND-OFF  [STAND-OFF]  81.41,82.3 0 top
STANDOFF24  STAND-OFF  [STAND-OFF]  81.41,115.32 0 top
STANDOFF25  STAND-OFF  [STAND-OFF]  103.5,2.54 0 top
STANDOFF26  STAND-OFF  [STAND-OFF]  103.5,35.56 0 top
STANDOFF27  STAND-OFF  [STAND-OFF]  103.5,42.42 0 top
STANDOFF28  STAND-OFF  [STAND-OFF]  103.5,75.44 0 top
STANDOFF29  STAND-OFF  [STAND-OFF]  103.5,82.3 0 top
STANDOFF30  STAND-OFF  [STAND-OFF]  103.5,115.32 0 top
U1  QRE1113  [QRE1113]  9.4,16.51 0 top
U2  QRE1113  [QRE1113]  20.83,16.51 0 top
U3  QRE1113  [QRE1113]  9.4,56.39 0 top
U4  QRE1113  [QRE1113]  20.83,56.39 0 top
U5  QRE1113  [QRE1113]  9.4,96.27 0 top
U6  QRE1113  [QRE1113]  20.83,96.27 0 top
U7  QRE1113  [QRE1113]  31.5,16.51 0 top
U8  QRE1113  [QRE1113]  42.93,16.51 0 top
U9  QRE1113  [QRE1113]  31.5,56.39 0 top
U10  QRE1113  [QRE1113]  42.93,56.39 0 top
U11  QRE1113  [QRE1113]  31.5,96.27 0 top
U12  QRE1113  [QRE1113]  42.93,96.27 0 top
U13  QRE1113  [QRE1113]  53.59,16.51 0 top
U14  QRE1113  [QRE1113]  65.02,16.51 0 top
U15  QRE1113  [QRE1113]  53.59,56.39 0 top
U16  QRE1113  [QRE1113]  65.02,56.39 0 top
U17  QRE1113  [QRE1113]  53.59,96.27 0 top
U18  QRE1113  [QRE1113]  65.02,96.27 0 top
U19  QRE1113  [QRE1113]  75.69,16.51 0 top
U20  QRE1113  [QRE1113]  87.12,16.51 0 top
U21  QRE1113  [QRE1113]  75.69,56.39 0 top
U22  QRE1113  [QRE1113]  87.12,56.39 0 top
U23  QRE1113  [QRE1113]  75.69,96.27 0 top
U24  QRE1113  [QRE1113]  87.12,96.27 0 top
U25  QRE1113  [QRE1113]  97.79,16.51 0 top
U26  QRE1113  [QRE1113]  109.22,16.51 0 top
U27  QRE1113  [QRE1113]  97.79,56.39 0 top
U28  QRE1113  [QRE1113]  109.22,56.39 0 top
U29  QRE1113  [QRE1113]  97.79,96.27 0 top
U30  QRE1113  [QRE1113]  109.22,96.27 0 top

## Library data of the parts
C1 C3 C4 C6 C8 C9 C12 C13 C15-C17 C20 C21 C23-C25 C28 C29 C31-C33 C36 C37 C39-C41 C44 C45 C47-C49 C52 C53 C55-C57 C60 C61 C63-C65 C68 C69 C71-C73 C76 C77 C79-C81 C84 C85 C87-C89 C92 C93 C95-C97 C100 C101 C103-C105 C108 C109 C111-C113 C116 C117 C119 C120 = SparkFun-Capacitors; PROD_ID: CAP-00810
C2 C5 C7 C10 C11 C14 C18 C19 C22 C26 C27 C30 C34 C35 C38 C42 C43 C46 C50 C51 C54 C58 C59 C62 C66 C67 C70 C74 C75 C78 C82 C83 C86 C90 C91 C94 C98 C99 C102 C106 C107 C110 C114 C115 C118 = SparkFun-Capacitors; PROD_ID: CAP-00868
E$1-E$6 FID1-FID30 LOGO1-LOGO45 = SparkFun-Aesthetics
JP1-JP15 = SparkFun-Connectors
Q1-Q30 = SparkFun-DiscreteSemi; PROD_ID: TRANS-08049
R1 R7 R13 R14 R25 R26 R37 R38 R49 R50 R61 R62 R73 R74 R85 R86 R97 R98 R109 R110 R121 R122 R133 R134 R145 R146 R157 R158 R169 R170 = SparkFun-Resistors; PROD_ID: RES-07863
R2 R4 R5 R8 R10 R11 R16 R17 R20 R21 R23 R24 R28 R29 R32 R33 R35 R36 R40 R41 R44 R45 R47 R48 R52 R53 R56 R57 R59 R60 R64 R65 R68 R69 R71 R72 R76 R77 R80 R81 R83 R84 R88 R89 R92 R93 R95 R96 R100 R101 R104 R105 R107 R108 R112 R113 R116 R117 R119 R120 R124 R125 R128 R129 R131 R132 R136 R137 R140 R141 R143 R144 R148 R149 R152 R153 R155 R156 R160 R161 R164 R165 R167 R168 R172 R173 R176 R177 R179 R180 = SparkFun-Resistors; PROD_ID: RES-00824
R3 R9 R15 R19 R27 R31 R39 R43 R51 R55 R63 R67 R75 R79 R87 R91 R99 R103 R111 R115 R123 R127 R135 R139 R147 R151 R159 R163 R171 R175 = SparkFun-Resistors; PROD_ID: RES-07871
R6 R12 R18 R22 R30 R34 R42 R46 R54 R58 R66 R70 R78 R82 R90 R94 R102 R106 R114 R118 R126 R130 R138 R142 R150 R154 R162 R166 R174 R178 = SparkFun-Resistors; PROD_ID: RES-07856
STANDOFF1-STANDOFF30 = SparkFun-Electromechanical
U1-U30 = SparkFun-Sensors; PROD_ID: IC-09357

## Nets
5V: C7.2 C8.1 JP1.3 JP1.4 R1.2 R3.2 R5.2 R7.2 R9.2 R11.2 U1.3 U2.3
5V1: C9.1 C14.2 JP2.3 JP2.4 R13.2 R14.2 R15.2 R17.2 R19.2 R21.2 U3.3 U4.3
5V2: C17.1 C22.2 JP3.3 JP3.4 R25.2 R26.2 R27.2 R29.2 R31.2 R33.2 U5.3 U6.3
5V3: C25.1 C30.2 JP4.3 JP4.4 R37.2 R38.2 R39.2 R41.2 R43.2 R45.2 U7.3 U8.3
5V4: C33.1 C38.2 JP5.3 JP5.4 R49.2 R50.2 R51.2 R53.2 R55.2 R57.2 U9.3 U10.3
5V5: C41.1 C46.2 JP6.3 JP6.4 R61.2 R62.2 R63.2 R65.2 R67.2 R69.2 U11.3 U12.3
5V6: C49.1 C54.2 JP7.3 JP7.4 R73.2 R74.2 R75.2 R77.2 R79.2 R81.2 U13.3 U14.3
5V7: C57.1 C62.2 JP8.3 JP8.4 R85.2 R86.2 R87.2 R89.2 R91.2 R93.2 U15.3 U16.3
5V8: C65.1 C70.2 JP9.3 JP9.4 R97.2 R98.2 R99.2 R101.2 R103.2 R105.2 U17.3 U18.3
5V9: C73.1 C78.2 JP10.3 JP10.4 R109.2 R110.2 R111.2 R113.2 R115.2 R117.2 U19.3 U20.3
5V10: C81.1 C86.2 JP11.3 JP11.4 R121.2 R122.2 R123.2 R125.2 R127.2 R129.2 U21.3 U22.3
5V11: C89.1 C94.2 JP12.3 JP12.4 R133.2 R134.2 R135.2 R137.2 R139.2 R141.2 U23.3 U24.3
5V12: C97.1 C102.2 JP13.3 JP13.4 R145.2 R146.2 R147.2 R149.2 R151.2 R153.2 U25.3 U26.3
5V13: C105.1 C110.2 JP14.3 JP14.4 R157.2 R158.2 R159.2 R161.2 R163.2 R165.2 U27.3 U28.3
5V14: C113.1 C118.2 JP15.3 JP15.4 R169.2 R170.2 R171.2 R173.2 R175.2 R177.2 U29.3 U30.3
GND: C1.2 C3.2 C4.2 C6.2 C7.1 C8.2 JP1.5 JP1.6 R2.1 R4.1 R6.1 R8.1 R10.1 R12.1 U1.2 U2.2
GND1: C9.2 C12.2 C13.2 C14.1 C15.2 C16.2 JP2.5 JP2.6 R16.1 R18.1 R20.1 R22.1 R23.1 R24.1 U3.2 U4.2
GND2: C17.2 C20.2 C21.2 C22.1 C23.2 C24.2 JP3.5 JP3.6 R28.1 R30.1 R32.1 R34.1 R35.1 R36.1 U5.2 U6.2
GND3: C25.2 C28.2 C29.2 C30.1 C31.2 C32.2 JP4.5 JP4.6 R40.1 R42.1 R44.1 R46.1 R47.1 R48.1 U7.2 U8.2
GND4: C33.2 C36.2 C37.2 C38.1 C39.2 C40.2 JP5.5 JP5.6 R52.1 R54.1 R56.1 R58.1 R59.1 R60.1 U9.2 U10.2
GND5: C41.2 C44.2 C45.2 C46.1 C47.2 C48.2 JP6.5 JP6.6 R64.1 R66.1 R68.1 R70.1 R71.1 R72.1 U11.2 U12.2
GND6: C49.2 C52.2 C53.2 C54.1 C55.2 C56.2 JP7.5 JP7.6 R76.1 R78.1 R80.1 R82.1 R83.1 R84.1 U13.2 U14.2
GND7: C57.2 C60.2 C61.2 C62.1 C63.2 C64.2 JP8.5 JP8.6 R88.1 R90.1 R92.1 R94.1 R95.1 R96.1 U15.2 U16.2
GND8: C65.2 C68.2 C69.2 C70.1 C71.2 C72.2 JP9.5 JP9.6 R100.1 R102.1 R104.1 R106.1 R107.1 R108.1 U17.2 U18.2
GND9: C73.2 C76.2 C77.2 C78.1 C79.2 C80.2 JP10.5 JP10.6 R112.1 R114.1 R116.1 R118.1 R119.1 R120.1 U19.2 U20.2
GND10: C81.2 C84.2 C85.2 C86.1 C87.2 C88.2 JP11.5 JP11.6 R124.1 R126.1 R128.1 R130.1 R131.1 R132.1 U21.2 U22.2
GND11: C89.2 C92.2 C93.2 C94.1 C95.2 C96.2 JP12.5 JP12.6 R136.1 R138.1 R140.1 R142.1 R143.1 R144.1 U23.2 U24.2
GND12: C97.2 C100.2 C101.2 C102.1 C103.2 C104.2 JP13.5 JP13.6 R148.1 R150.1 R152.1 R154.1 R155.1 R156.1 U25.2 U26.2
GND13: C105.2 C108.2 C109.2 C110.1 C111.2 C112.2 JP14.5 JP14.6 R160.1 R162.1 R164.1 R166.1 R167.1 R168.1 U27.2 U28.2
GND14: C113.2 C116.2 C117.2 C118.1 C119.2 C120.2 JP15.5 JP15.6 R172.1 R174.1 R176.1 R178.1 R179.1 R180.1 U29.2 U30.2
N$1: C1.1 C2.1 R2.2 U1.4
N$2: C2.2 Q1.1 R3.1 R4.2
N$3: C3.1 Q1.2 R6.2
N$4: R13.1 U3.1
N$5: R1.1 U1.1
N$6: R14.1 U4.1
N$7: C6.1 Q2.2 R12.2
N$8: C4.1 C5.1 R8.2 U2.4
N$9: C5.2 Q2.1 R9.1 R10.2
N$10: R7.1 U2.1
N$11: C10.1 C15.1 R23.2 U3.4
N$12: C10.2 Q3.1 R15.1 R16.2
N$13: C12.1 Q3.2 R22.2
N$14: C13.1 Q4.2 R18.2
N$15: C11.1 C16.1 R24.2 U4.4
N$16: C11.2 Q4.1 R19.1 R20.2
N$17: R25.1 U5.1
N$18: R26.1 U6.1
N$19: C18.1 C23.1 R35.2 U5.4
N$20: C18.2 Q5.1 R27.1 R28.2
N$21: C20.1 Q5.2 R34.2
N$22: C21.1 Q6.2 R30.2
N$23: C19.1 C24.1 R36.2 U6.4
N$24: C19.2 Q6.1 R31.1 R32.2
N$25: R37.1 U7.1
N$26: R38.1 U8.1
N$27: C26.1 C31.1 R47.2 U7.4
N$28: C26.2 Q7.1 R39.1 R40.2
N$29: C28.1 Q7.2 R46.2
N$30: C29.1 Q8.2 R42.2
N$31: C27.1 C32.1 R48.2 U8.4
N$32: C27.2 Q8.1 R43.1 R44.2
N$33: R49.1 U9.1
N$34: R50.1 U10.1
N$35: C34.1 C39.1 R59.2 U9.4
N$36: C34.2 Q9.1 R51.1 R52.2
N$37: C36.1 Q9.2 R58.2
N$38: C37.1 Q10.2 R54.2
N$39: C35.1 C40.1 R60.2 U10.4
N$40: C35.2 Q10.1 R55.1 R56.2
N$41: R61.1 U11.1
N$42: R62.1 U12.1
N$43: C42.1 C47.1 R71.2 U11.4
N$44: C42.2 Q11.1 R63.1 R64.2
N$45: C44.1 Q11.2 R70.2
N$46: C45.1 Q12.2 R66.2
N$47: C43.1 C48.1 R72.2 U12.4
N$48: C43.2 Q12.1 R67.1 R68.2
N$49: R73.1 U13.1
N$50: R74.1 U14.1
N$51: C50.1 C55.1 R83.2 U13.4
N$52: C50.2 Q13.1 R75.1 R76.2
N$53: C52.1 Q13.2 R82.2
N$54: C53.1 Q14.2 R78.2
N$55: C51.1 C56.1 R84.2 U14.4
N$56: C51.2 Q14.1 R79.1 R80.2
N$57: R85.1 U15.1
N$58: R86.1 U16.1
N$59: C58.1 C63.1 R95.2 U15.4
N$60: C58.2 Q15.1 R87.1 R88.2
N$61: C60.1 Q15.2 R94.2
N$62: C61.1 Q16.2 R90.2
N$63: C59.1 C64.1 R96.2 U16.4
N$64: C59.2 Q16.1 R91.1 R92.2
N$65: R97.1 U17.1
N$66: R98.1 U18.1
N$67: C66.1 C71.1 R107.2 U17.4
N$68: C66.2 Q17.1 R99.1 R100.2
N$69: C68.1 Q17.2 R106.2
N$70: C69.1 Q18.2 R102.2
N$71: C67.1 C72.1 R108.2 U18.4
N$72: C67.2 Q18.1 R103.1 R104.2
N$73: R109.1 U19.1
N$74: R110.1 U20.1
N$75: C74.1 C79.1 R119.2 U19.4
N$76: C74.2 Q19.1 R111.1 R112.2
N$77: C76.1 Q19.2 R118.2
N$78: C77.1 Q20.2 R114.2
N$79: C75.1 C80.1 R120.2 U20.4
N$80: C75.2 Q20.1 R115.1 R116.2
N$81: R121.1 U21.1
N$82: R122.1 U22.1
N$83: C82.1 C87.1 R131.2 U21.4
N$84: C82.2 Q21.1 R123.1 R124.2
N$85: C84.1 Q21.2 R130.2
N$86: C85.1 Q22.2 R126.2
N$87: C83.1 C88.1 R132.2 U22.4
N$88: C83.2 Q22.1 R127.1 R128.2
N$89: R133.1 U23.1
N$90: R134.1 U24.1
N$91: C90.1 C95.1 R143.2 U23.4
N$92: C90.2 Q23.1 R135.1 R136.2
N$93: C92.1 Q23.2 R142.2
N$94: C93.1 Q24.2 R138.2
N$95: C91.1 C96.1 R144.2 U24.4
N$96: C91.2 Q24.1 R139.1 R140.2
N$97: R145.1 U25.1
N$98: R146.1 U26.1
N$99: C98.1 C103.1 R155.2 U25.4
N$100: C98.2 Q25.1 R147.1 R148.2
N$101: C100.1 Q25.2 R154.2
N$102: C101.1 Q26.2 R150.2
N$103: C99.1 C104.1 R156.2 U26.4
N$104: C99.2 Q26.1 R151.1 R152.2
N$105: R157.1 U27.1
N$106: R158.1 U28.1
N$107: C106.1 C111.1 R167.2 U27.4
N$108: C106.2 Q27.1 R159.1 R160.2
N$109: C108.1 Q27.2 R166.2
N$110: C109.1 Q28.2 R162.2
N$111: C107.1 C112.1 R168.2 U28.4
N$112: C107.2 Q28.1 R163.1 R164.2
N$113: R169.1 U29.1
N$114: R170.1 U30.1
N$115: C114.1 C119.1 R179.2 U29.4
N$116: C114.2 Q29.1 R171.1 R172.2
N$117: C116.1 Q29.2 R178.2
N$118: C117.1 Q30.2 R174.2
N$119: C115.1 C120.1 R180.2 U30.4
N$120: C115.2 Q30.1 R175.1 R176.2
OUTA: JP1.1 Q1.3 R5.1
OUTA1: JP2.1 Q3.3 R17.1
OUTA2: JP3.1 Q5.3 R29.1
OUTA3: JP4.1 Q7.3 R41.1
OUTA4: JP5.1 Q9.3 R53.1
OUTA5: JP6.1 Q11.3 R65.1
OUTA6: JP7.1 Q13.3 R77.1
OUTA7: JP8.1 Q15.3 R89.1
OUTA8: JP9.1 Q17.3 R101.1
OUTA9: JP10.1 Q19.3 R113.1
OUTA10: JP11.1 Q21.3 R125.1
OUTA11: JP12.1 Q23.3 R137.1
OUTA12: JP13.1 Q25.3 R149.1
OUTA13: JP14.1 Q27.3 R161.1
OUTA14: JP15.1 Q29.3 R173.1
OUTB: JP1.2 Q2.3 R11.1
OUTB1: JP2.2 Q4.3 R21.1
OUTB2: JP3.2 Q6.3 R33.1
OUTB3: JP4.2 Q8.3 R45.1
OUTB4: JP5.2 Q10.3 R57.1
OUTB5: JP6.2 Q12.3 R69.1
OUTB6: JP7.2 Q14.3 R81.1
OUTB7: JP8.2 Q16.3 R93.1
OUTB8: JP9.2 Q18.3 R105.1
OUTB9: JP10.2 Q20.3 R117.1
OUTB10: JP11.2 Q22.3 R129.1
OUTB11: JP12.2 Q24.3 R141.1
OUTB12: JP13.2 Q26.3 R153.1
OUTB13: JP14.2 Q28.3 R165.1
OUTB14: JP15.2 Q30.3 R177.1